# Altium PCB PCB.PcbDoc
Units mm, origin at the board's own origin, x right, y up, seen from the top; angles counter-clockwise.
Board outline 39.51 x 36.13 mm, 2 copper layers (Top Layer, Bottom Layer); 13 components, 9 nets, 33 pads, 6 vias.
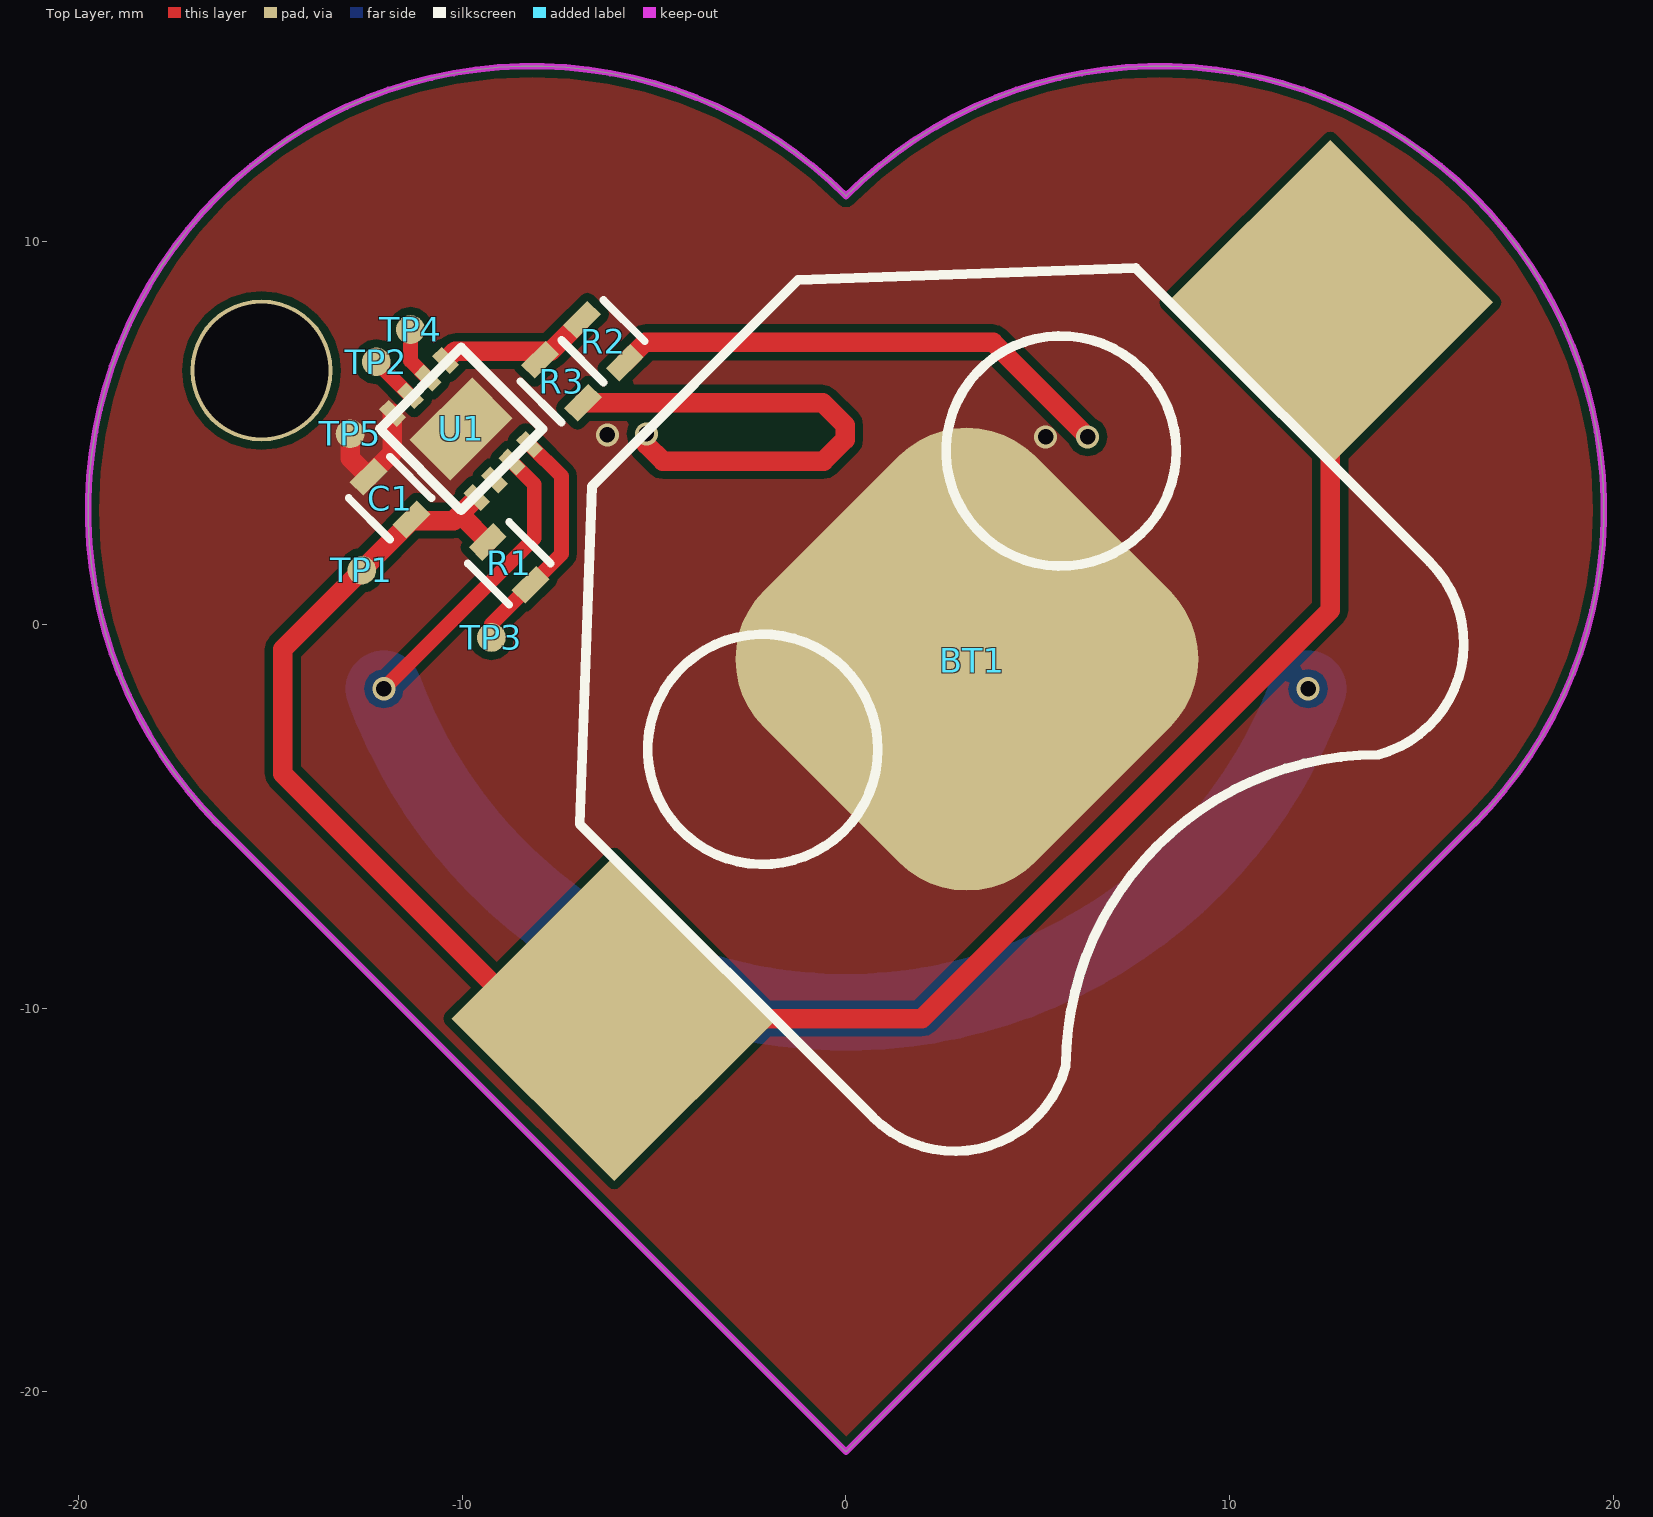
[diagram p0: Top Layer view]
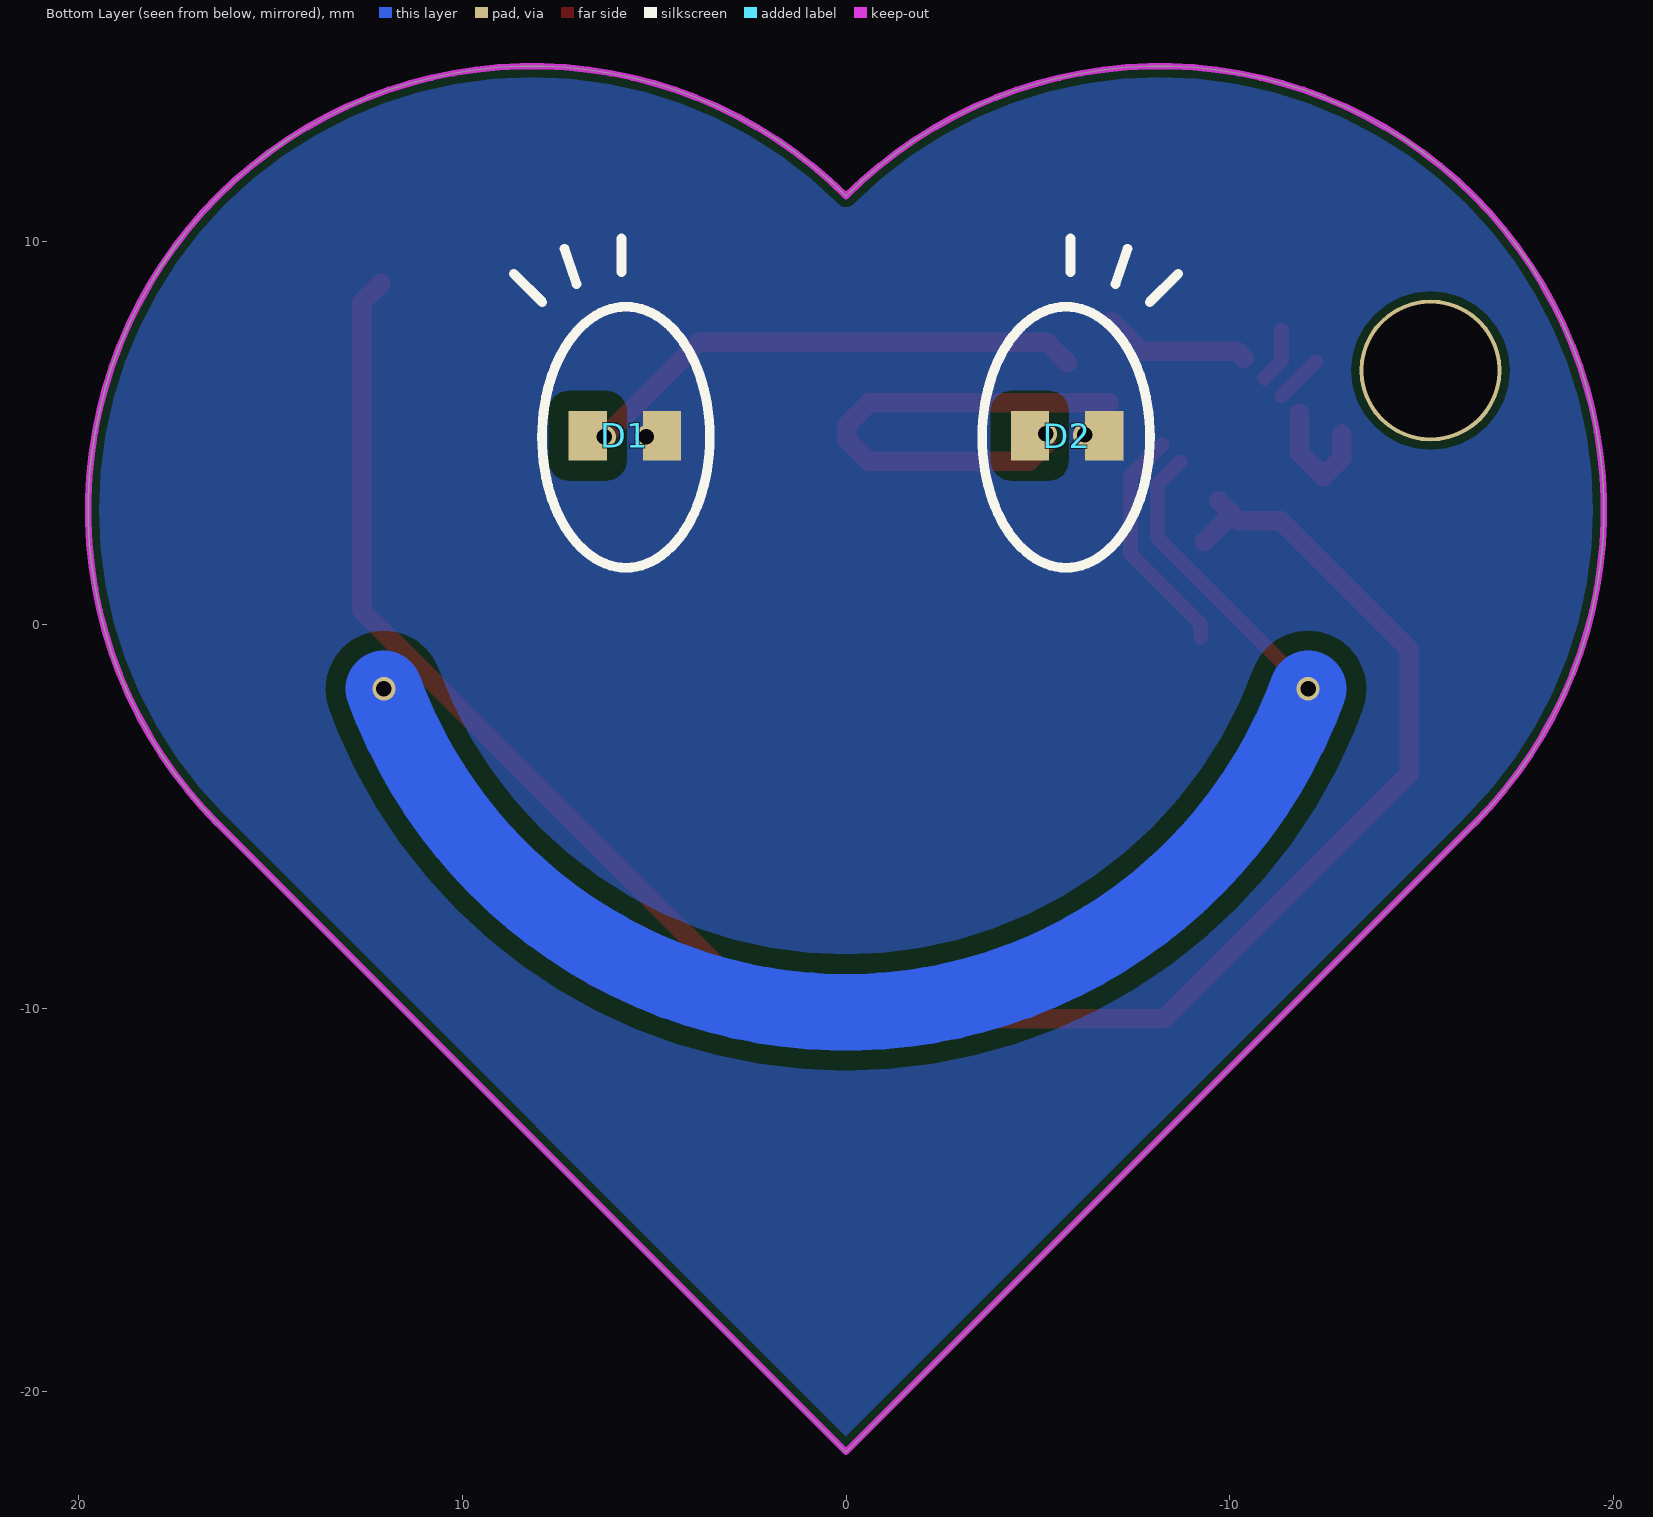
[diagram p1: Bottom Layer view, seen from below]
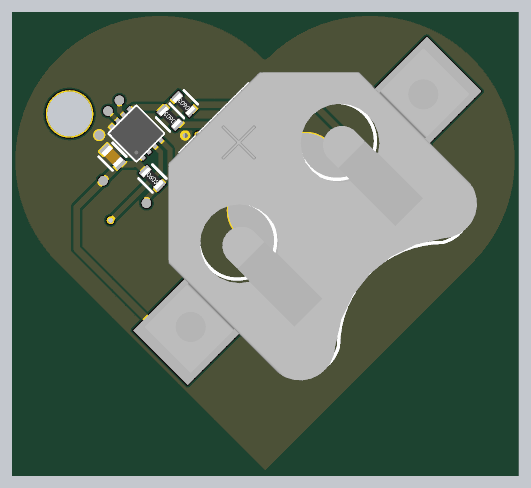
[diagram p2: 3D render of the assembled board from above, using the file's embedded part models]

## Layer stack, top to bottom
Top Solder: solder mask 0.0102, Solder Resist, Dk 3.5
Top Layer: signal copper 0.0356
Dielectric 1: dielectric 0.32, FR-4, Dk 4.8
Bottom Layer: signal copper 0.0356
Bottom Solder: solder mask 0.0102, Solder Resist, Dk 3.5

## Board outline
-16.37,-5.194 0,-21.563 16.37,-5.194 ccw(c8.185,2.991) 0,11.176 ccw(c-8.185,2.991)

## Design rules (kind name [scope] priority, off if disabled: settings)
AssemblyTestPointUsage [All] p1 off:
AssemblyTestpoint [All] p1 off: testpointundercomponent=TRUE minsize=1.016 maxsize=2.54 preferedsize=1.524 minholesize=0 maxholesize=1.016 preferedholesize=0.813 testpointgrid=0.025 usegrid=TRUE gridtolerance=0 allowsidetop=TRUE allowsidebottom=TRUE
Clearance "Poly Clearance" [IsRegion vs OnLayer('Bottom Layer')] p1: gap=0.508 ignorepadtopadclearanceinfootprint=FALSE
Clearance [All] p2: gap=0.203 ignorepadtopadclearanceinfootprint=FALSE except(0: Arc-Hole Track-Hole SMDPad-Hole THPad-Hole Via-Hole Fill-Hole Poly-Hole Region-Hole Text-Hole)
ComponentClearance [All] p1 off: gap=0.254 collisioncheckmode=3 verticalgap=0.254 showdistances=FALSE
FabricationTestPointUsage [All] p1 off: valid=0 allowmultiple=FALSE
FabricationTestpoint [All] p1 off: side=3 testpointundercomponent=TRUE minsize=1.016 maxsize=2.54 preferedsize=1.524 minholesize=0 maxholesize=1.016 preferedholesize=0.813 testpointgrid=0.025 allowsidetop=TRUE allowsidebottom=TRUE usegrid=TRUE gridtolerance=0
FanoutControl Fanout_BGA [IsBGA] p1 off: bgadir=Out bgaviamode=Centered fanoutstyle=Auto fanoutdirection=Alternating viagrid=0.025 // Fanout_BGA (Default Rule)
FanoutControl Fanout_LCC [IsLCC] p2 off: bgadir=Out bgaviamode=Centered fanoutstyle=Auto fanoutdirection=Alternating viagrid=0.025 // Fanout_LCC (Default Rule)
FanoutControl Fanout_SOIC [IsSOIC] p3 off: bgadir=Out bgaviamode=Centered fanoutstyle=Auto fanoutdirection=Alternating viagrid=0.025 // Fanout_SOIC (Default Rule)
FanoutControl Fanout_Small [(CompPinCount < 5)] p4 off: bgadir=Out bgaviamode=Centered fanoutstyle=Auto fanoutdirection=OutThenIn viagrid=0.025 // Fanout_Small (Default Rule)
FanoutControl Fanout_Default [All] p5 off: bgadir=Out bgaviamode=Centered fanoutstyle=Auto fanoutdirection=Alternating viagrid=0.025 // Fanout_Default (Default Rule)
Height [All] p1 off: minheight=0 maxheight=25.4 prefheight=12.7
HoleSize [All] p1: absolutevalues=TRUE maxlimit=6.3 minlimit=0.3 maxpercent=80.000 minpercent=20.000
MinimumSolderMaskSliver [All] p1 off: minsoldermaskwidth=0.254
NetAntennae [All] p1 off: netantennaetolerance=0
PasteMaskExpansion [All] p1 off: expansion=0
PlaneConnect [All] p1: planeconnectstyle=Direct reliefexpansion=0.508 reliefentries=4 reliefconductorwidth=0.254 reliefairgap=0.254
PolygonConnect [All] p1: connectstyle=Direct reliefconductorwidth=0.508 reliefentries=4 polygonreliefangle="45 Angle" airgapwidth=0.508
RoutingVias [All] p1: holewidth=0.4 width=0.6 viastyle="Through Hole" minholewidth=0.4 minwidth=0.6 maxholewidth=10 maxwidth=10
SilkToSilkClearance [All] p1 off: silktosilkclearance=0.254
SilkToSolderMaskClearance [IsPad] p1 off: minsilkscreentomaskgap=0.254 clearancetoexposedcopper=TRUE
SolderMaskExpansion [All] p1 off: expansion=0.102
UnpouredPolygon [All] p1: allowshelved=TRUE
Width [All] p1: maxlimit=12.7 minlimit=0.152 preferedwidth=0.254
11 further rules are at their usual default settings.

## Classes and differential pairs
net class LED: NetD1_A NetD2_A

## Components (designator, comment, footprint, x,y, rotation, side; value= is the part's Value field where it differs from the comment)
BT1 "Battery" "CR2032 SMD" -3.937,6.299 r45 top
C1 "Cap" "0603 - CAP" -11.887,3.302 r315 top value=4.7u
D1 "LED" "0805 -  LED" 5.766,4.928 r180 bottom
D2 "LED" "0805 -  LED" -5.766,4.928 r180 bottom
R1 "Res" 0603 -8.782,1.6 r315 top value=2K2
R2 "Res" 0603 -6.325,7.392 r135 top value=200
R3 "Res" 0603 -7.417,6.35 r135 top value=200
TP1 "Test Point" TP_SMD_1mm -12.624,1.422 r0 top
TP2 "Test Point" TP_SMD_1mm -12.245,6.858 r90 top
TP3 "Test Point" TP_SMD_1mm -9.246,-0.33 r90 top
TP4 "Test Point" TP_SMD_1mm -11.354,7.696 r90 top
TP5 "Test Point" TP_SMD_1mm -12.929,4.978 r90 top
U1 "PIC12LF1822-I/MF" PIC12LF1822-I/MF -10.033,5.105 r45 top

## Footprints (in the part's own frame and the unit in brackets; to place one, negate y for a bottom-side part, rotate by r counter-clockwise, add the part's x,y. Pads: shape width x height; smd on the part's side, far side on the other; paste and mask are expansions set on the pad)
0603 [mm]
  rect 0.5x0.9 smd: 1(-0.79,0) 2(0.79,0)
  silkscreen extent -0.76,-0.76 0.76,0.76, body extent -0.85,-0.4 0.85,0.4, height 0.56
"0603 - CAP" [mm]
  rect 0.5x0.9 smd: 1(-0.79,0) 2(0.79,0)
  silkscreen extent -0.76,-0.76 0.76,0.76, body extent -0.8,-0.44 0.8,0.46, height 0.8
"0805 -  LED" [mm]
  rect 1x1.3 smd: A(-0.97,0) K(0.97,0)
  body extent -1.01,-0.63 1.01,0.62, height 1.1
"CR2032 SMD" [mm] "SMD Battery holder CR 2032"
  rect 6x6 smd: 1(-13.2,-10.225) 1(13.2,-10.225)
  rrect50% 10x10 smd: 2(-0.075,-10.1)
  silkscreen extent -10.25,-19.85 10.25,0, body extent -15.37,-19.98 15.37,0.07, height 3.96
PIC12LF1822-I/MF [mm] "PIC12LF1822-I/MF"
  rect 0.35x0.65 smd: 1(-0.975,-1.55) 2(-0.325,-1.55) 3(0.325,-1.55) 4(0.975,-1.55) 5(0.975,1.55) 6(0.325,1.55) 7(-0.325,1.55) 8(-0.975,1.55)
  rect 2.3x1.5 smd: EP(0,0)
  silkscreen extent -1.5,-1.5 1.5,1.5, body extent -1.5,-1.51 1.5,1.51, height 0.8
TP_SMD_1mm [mm]
  round 0.75 smd: 1(0,0)

## Part data
BT1: "Multicell Battery", LatestRevisionDate=17-Jul-2002, LatestRevisionNote="Re-released for DXP Platform.", PackageDescription="Battery; 2 Leads", PackageReference=BAT-2, Published=24-Mar-1999, Publisher="Altium Limited"
C1: "Capacitor", LatestRevisionDate=17-Jul-2002, LatestRevisionNote="Re-released for DXP Platform.", PackageDescription="Radial Cap, Thru-Hole; 2 Leads; 0.3 in Pin Spacing", PackageReference=RAD-0.3, Published=8-Jun-2000, Publisher="Altium Limited"
D1: "Typical RED GaAs LED", LatestRevisionDate=08-Jul-2005, LatestRevisionNote="Mech Layer 1 removed.", PackageDescription="LED; 2 Leads", PackageReference=LED-1, Published=8-Jun-2000, Publisher="Altium Limited", Supplier 1=Digi-Key, Supplier Part Number 2=475-1278-1-ND
D2: "Typical RED GaAs LED", Supplier Part Number 1=475-1278-1-ND, LatestRevisionDate=08-Jul-2005, LatestRevisionNote="Mech Layer 1 removed.", PackageDescription="LED; 2 Leads", PackageReference=LED-1, Published=8-Jun-2000, Publisher="Altium Limited", Supplier 1=Digi-Key
R1: "Resistor", LatestRevisionDate=17-Jul-2002, LatestRevisionNote="Re-released for DXP Platform.", PackageDescription="Axial Device, Thru-Hole; 2 Leads; 0.3 in Pin Spacing", PackageReference=AXIAL-0.3, Published=8-Jun-2000, Publisher="Altium Limited"
R2 R3: "Resistor", Supplier Part Number 1=311-200HRTR-ND, LatestRevisionDate=17-Jul-2002, LatestRevisionNote="Re-released for DXP Platform.", PackageDescription="Axial Device, Thru-Hole; 2 Leads; 0.3 in Pin Spacing", PackageReference=AXIAL-0.3, Published=8-Jun-2000, Publisher="Altium Limited", Supplier 1=Digi-Key
U1: Manufacturer="Microchip Technology", Distributor=Digikey, Distributor PN=PIC12LF1822-I/MF-ND, Manufacturer PN=PIC12LF1822-I/MF

## Free pads (board coordinates)
  round 0.006 on Bottom Overlay: 1(0.606,10.427) 1(0.612,10.427)
  round 0.013 on Bottom Overlay: 1(0.609,10.427)
  round 3.7 hole 3.5: ""(-15.24,6.629)

## Via types
v1: diameter 0.6, hole 0.4, Top Layer to Bottom Layer, 6 vias

## Nets (pads, with @x,y where several pads share a name; then routed paths per layer and width w, separated by ;. In a path a pad name is that pad's centre, name@x,y a point inside that pad or via, vN(x,y) a via of type N, cw(c..) or ccw(c..) an arc to the next point about the centre after c; other vN are vias at no path point)
CLK: TP4.1 U1.6 | length 1.5
  Top Layer w0.381: TP4.1 -11.354,6.886 U1.6
DAT: TP2.1 U1.7 | length 1.3
  Top Layer w0.381: TP2.1 U1.7
GND: BT1.2 C1.1 D1.K D2.K TP5.1 U1.8 U1.EP | length 3.2
  Top Layer w0.508: TP5.1 -12.929,4.343 C1.1 -11.834,4.473 -11.834,5.497 U1.8
  other v1: 5.207,4.902 -6.223,4.953
LED: R2.2 R3.2 U1.5 | length 3.8
  Top Layer w0.508: U1.5@-10.38,6.951 -10.193,7.137 -7.696,7.137 R2.2@-6.934,7.899
NetD1_A: D1.A R2.1 | length 13.3
  Top Layer w0.508: R2.1 -5.233,7.366 3.835,7.366 v1(6.299,4.902)
NetD2_A: D2.A R3.1 | length 13.3
  Top Layer w0.508: R3.1 -0.61,5.791 -0.025,5.207 -0.025,4.826 -0.584,4.267 -4.775,4.267 -5.207,4.699 v1(-5.207,4.978)
RST: R1.2 TP3.1 U1.4 | length 6.1
  Top Layer w0.381: TP3.1 -9.246,0.019 R1.2 -7.417,1.848 -7.417,3.868 U1.4
TOUCH: U1.3 | length 39.1
  Top Layer w0.381: v1(-12.049,-1.667) -8.128,2.254 -8.128,3.66 U1.3
  Bottom Layer w2: v1(-12.049,-1.667) ccw(c0,2.718) v1(12.049,-1.667)
VCC: BT1.1 C1.2 R1.1 TP1.1 U1.1 | length 53.9
  Top Layer w0.508: -10.016,2.835 R1.1 ; U1.1@-9.712,3.235 -10.228,2.718 -11.329,2.718 -14.681,-0.635 -14.681,-3.886 -8.303,-10.265 -6.041,-10.265 1.978,-10.265 12.627,0.384 12.627,8.403 BT1.1@12.127,8.902
pads on no net: U1.2

## Polygon pours and split planes (outlines as drawn)
GND on Bottom Layer "BOT-GND" (solid, pour order 0): -16.37,-5.194 0,-21.563 16.37,-5.194 ccw(c8.185,2.991) 0,11.176 ccw(c-8.185,2.991)
GND on Top Layer "TOP GND" (solid, remove dead copper, pour order 1): -16.37,-5.194 0,-21.563 16.37,-5.194 ccw(c8.185,2.991) 0,11.176 ccw(c-8.185,2.991)

## Keep-outs
Keep-Out Layer:
  the board outline again, w0.168

## Silkscreen, mask and mechanical layers (free items; w line width, h text height)
Top Overlay:
  lines w0.013: -89.206,-59.996 -74.418,-59.996 ; -89.206,-59.996 -74.418,-59.996 ; -89.206,-59.996 -74.418,-59.996 ; -89.206,-59.996 -74.418,-59.996
Bottom Overlay:
  drawing of 206 lines, arcs and shapes, not listed
Bottom Solder:
  lines w2: -12.049,-1.667 ccw(c0,2.718) 12.049,-1.667